# EAGLE board belsekolah (EAGLE 5.11)
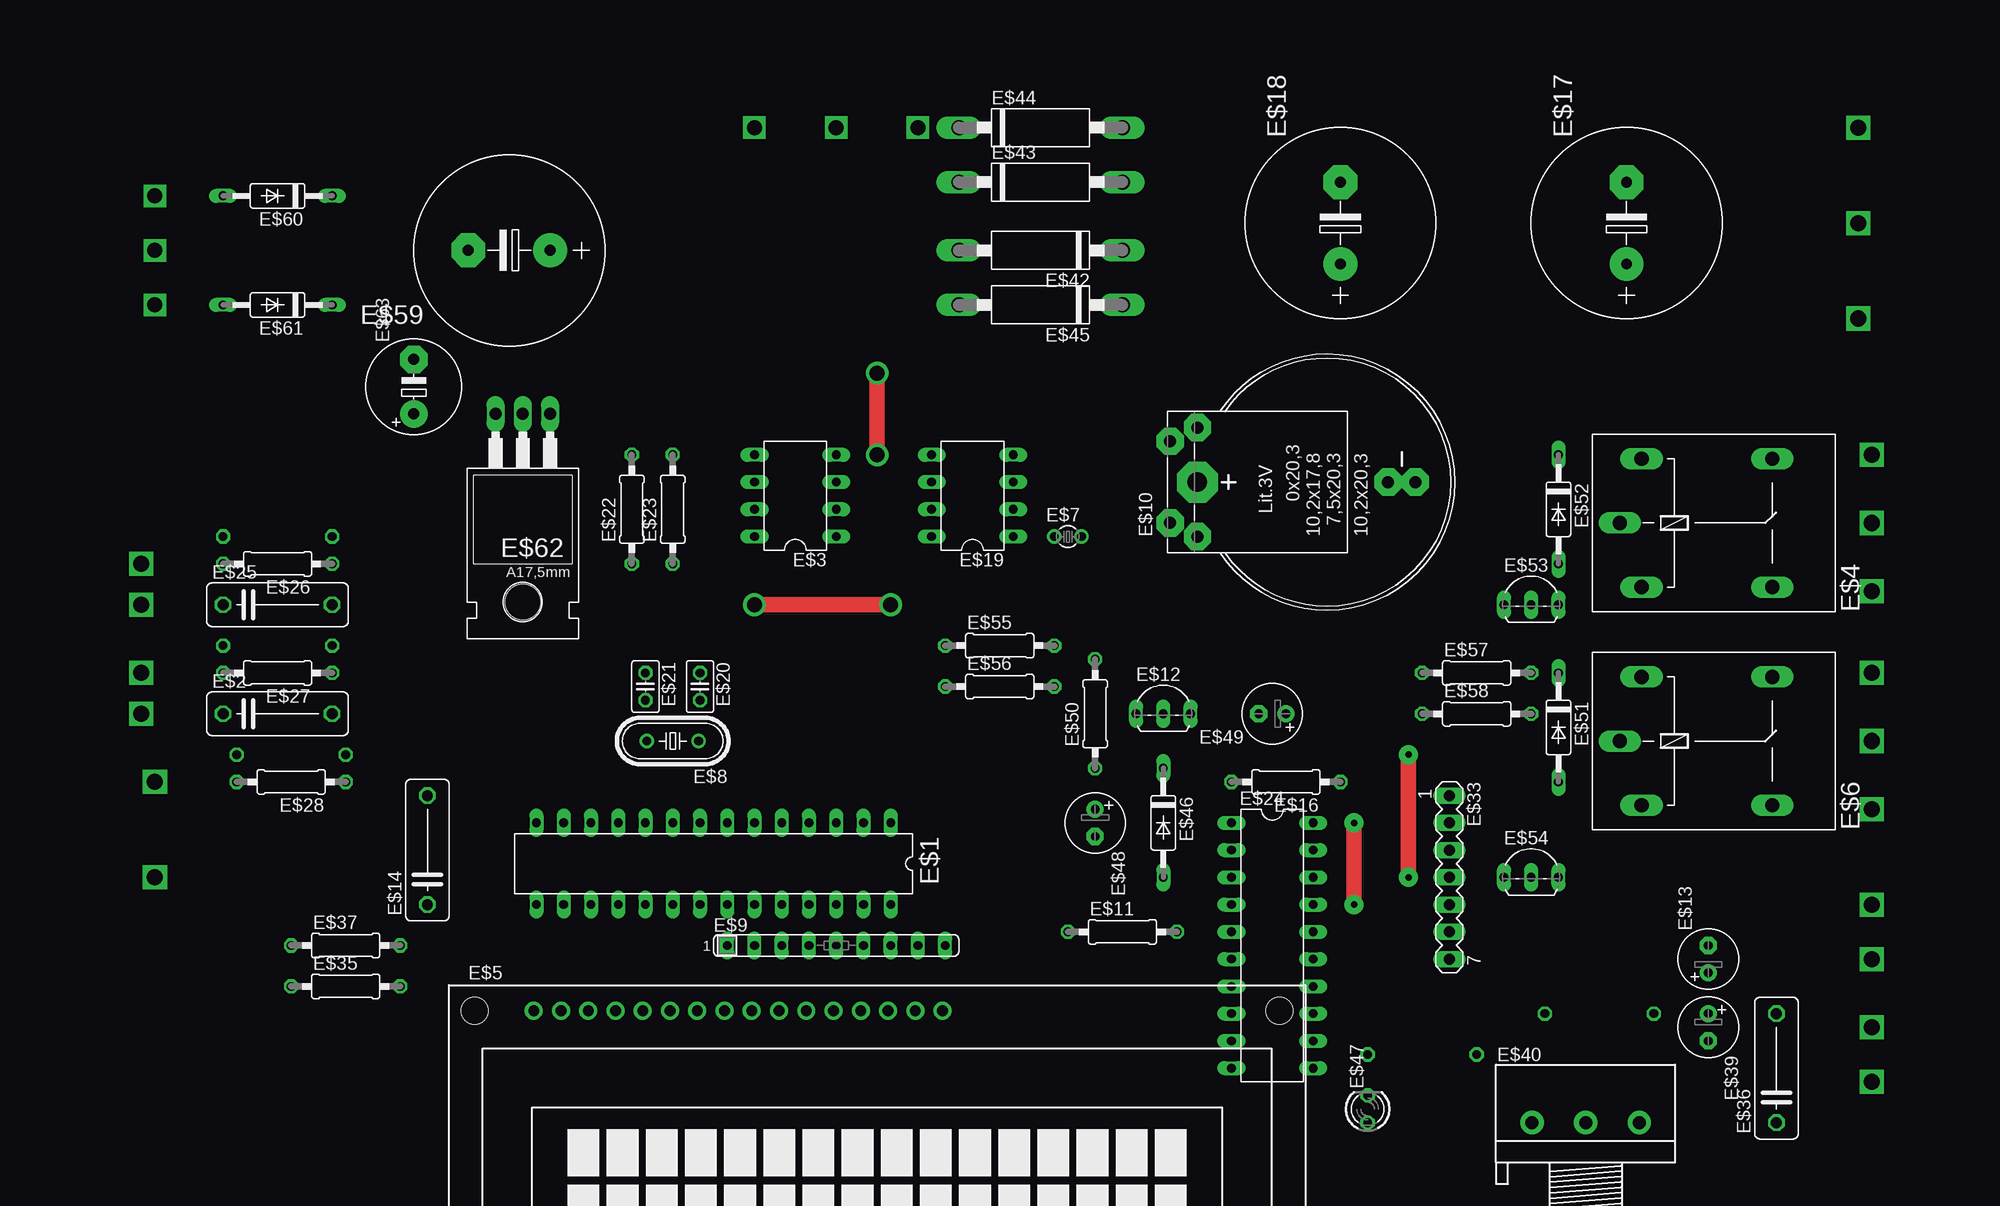
[diagram p0: board, top side]
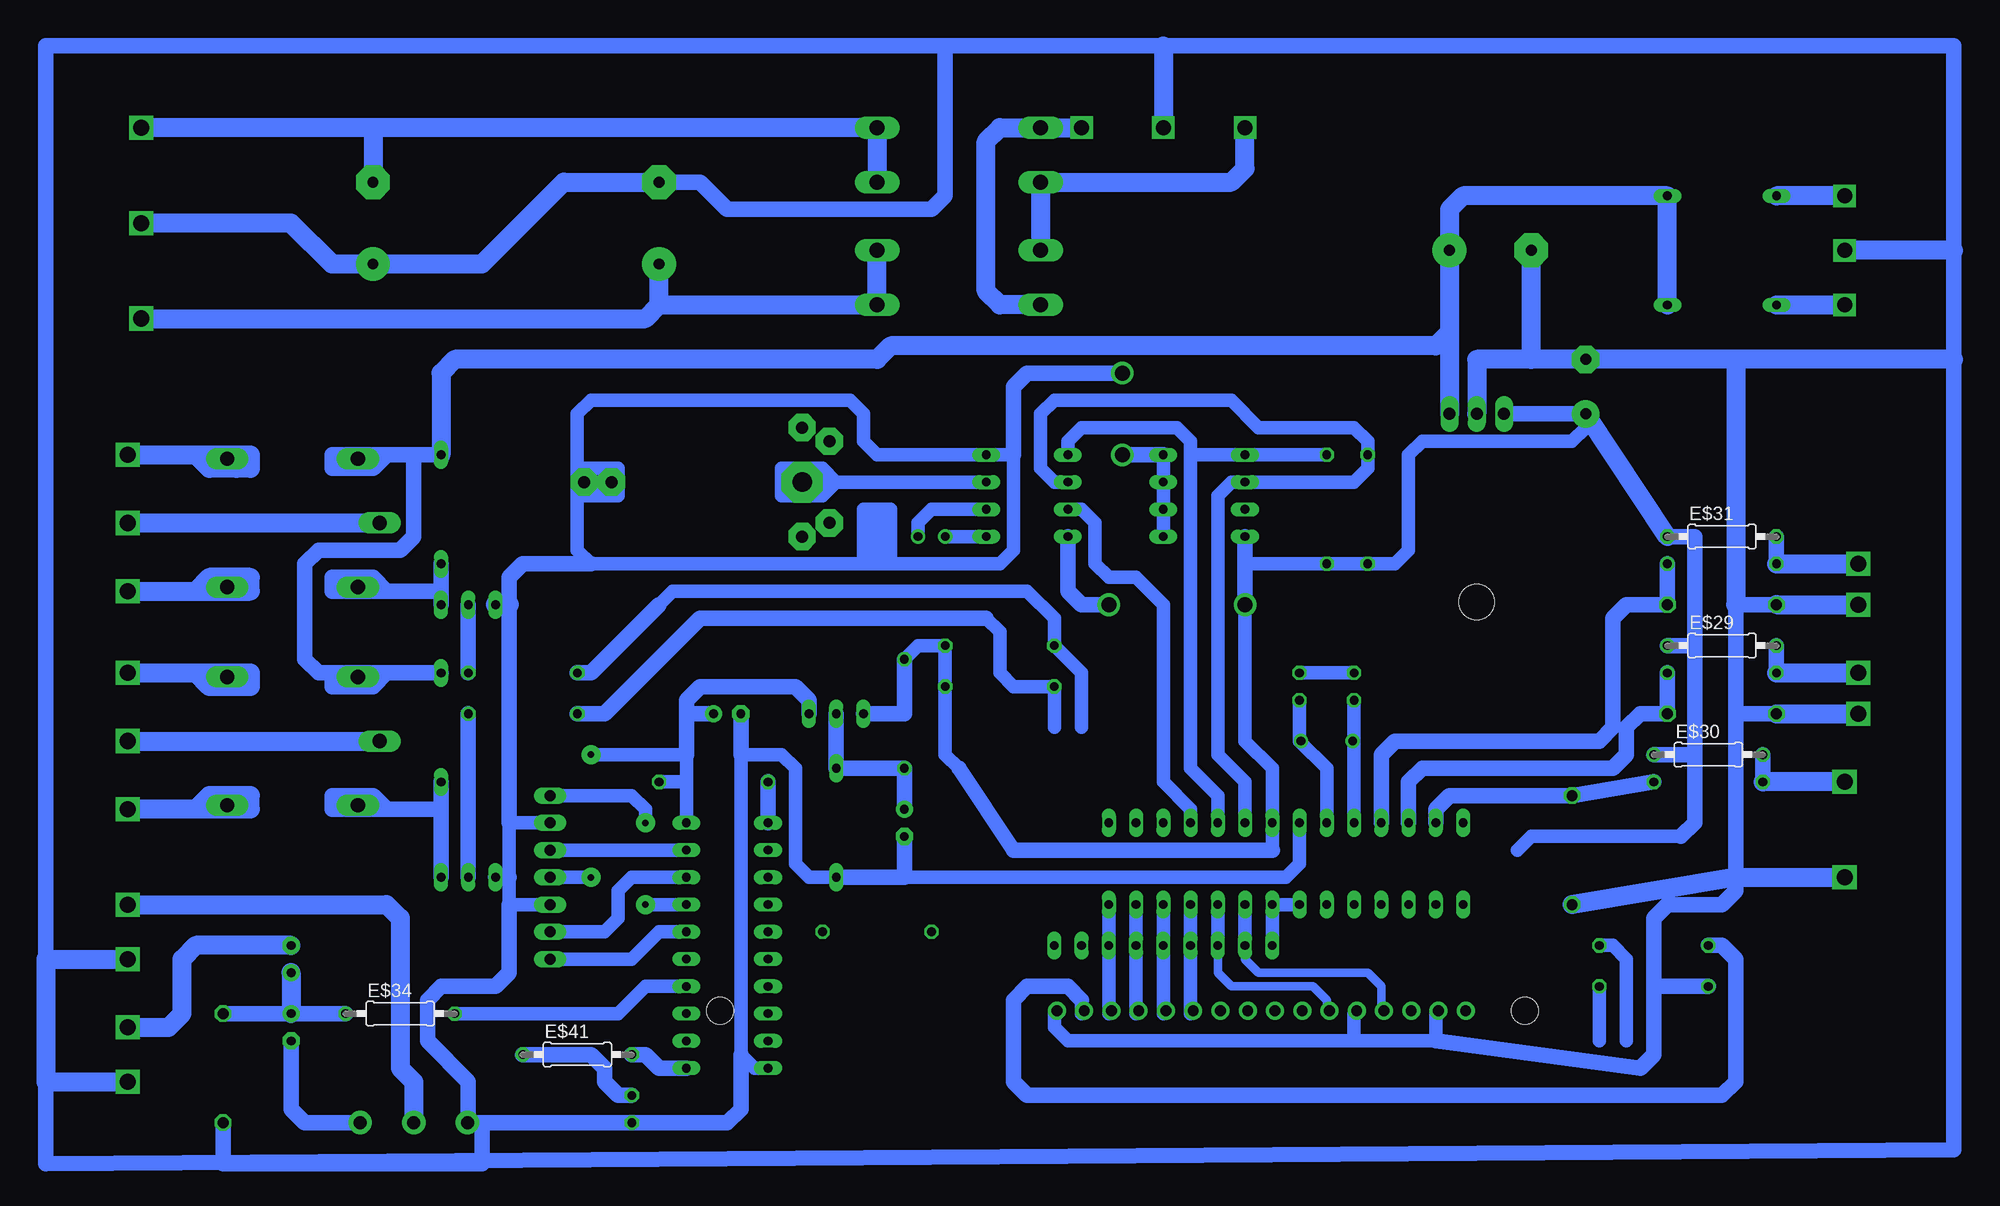
[diagram p1: board, bottom side, seen from below]

No outline drawn. Coordinates in mm, seen from the top.
Copper layers (1*16): Top 0.035mm / dielectric 1.5mm / Bottom 0.035mm
Design rules "default": minimum track width 10mil, minimum drill 24mil, track to track 8mil, track to pad 8mil, pad to pad 8mil, via to via 8mil, smd to smd 8mil, copper to edge 40mil, drill to drill 8mil, minimum pad ring 10mil, minimum via ring 8mil, stop-mask expansion 4mil, vias tented up to drill 0mil, thermal gap 10mil

## Footprints (pad centres in the part's own frame; a part is rotated, then mirrored left to right if it is on the bottom)
DIL28-3 = drill 0.813 long: 1 -16.51,-3.81; 2 -13.97,-3.81; 3 -11.43,-3.81; 4 -8.89,-3.81; 5 -6.35,-3.81; 6 -3.81,-3.81; 7 -1.27,-3.81; 8 1.27,-3.81; 9 3.81,-3.81; 10 6.35,-3.81; 11 8.89,-3.81; 12 11.43,-3.81; 13 13.97,-3.81; 14 16.51,-3.81; 15 16.51,3.81; 16 13.97,3.81; 17 11.43,3.81; 18 8.89,3.81; 19 6.35,3.81; 20 3.81,3.81; 21 1.27,3.81; 22 -1.27,3.81; 23 -3.81,3.81; 24 -6.35,3.81; 25 -8.89,3.81; 26 -11.43,3.81; 27 -13.97,3.81; 28 -16.51,3.81
C102-043X133 = drill 1.016 octagon: 1 -5.08,0; 2 5.08,0
DIL08 = drill 0.813 long: 1 -3.81,-3.81; 2 -1.27,-3.81; 3 1.27,-3.81; 4 3.81,-3.81; 5 3.81,3.81; 6 1.27,3.81; 7 -1.27,3.81; 8 -3.81,3.81
G5LE = drill 1.321 long: 1 -7.493,-5.969; 2 -7.493,5.969; O 4.699,5.969; P -9.525,0; S 4.699,-5.969
TUXGR_16X2_R2 = drill 1 pad 1.676 round: 1 -32,15.5; 2 -29.46,15.5; 3 -26.92,15.5; 4 -24.38,15.5; 5 -21.84,15.5; 6 -19.3,15.5; 7 -16.76,15.5; 8 -14.22,15.5; 9 -11.68,15.5; 10 -9.14,15.5; 11 -6.6,15.5; 12 -4.06,15.5; 13 -1.52,15.5; 14 1.02,15.5; 15 3.56,15.5; 16 6.1,15.5 | hole 2.5: -37.5,-15.5; 37.5,-15.5; -37.5,15.5; 37.5,15.5
TC26V = drill 0.813 round: 1 -1.27,0; 2 1.27,0
HC49/S = drill 0.813 round: 1 -2.413,0; 2 2.413,0
SIL9 = drill 0.813 long: 1 -10.16,0; 2 -7.62,0; 3 -5.08,0; 4 -2.54,0; 5 0,0; 6 2.54,0; 7 5.08,0; 8 7.62,0; 9 10.16,0
B2430UNI = drill 1.118 pad 2.54 octagon: + 3.81,14.605; +@1 -3.81,14.605; +@2 -5.08,12.065; +@3 5.08,12.065; - 0,-5.715; -@1 0,-8.255 | drill 1.803 pad 3.81 octagon: +@4 0,12.065
0207/10 = drill 0.813 octagon: 1 -5.08,0; 2 5.08,0
TO92-CEB = drill 0.813 long: B 2.54,0; C -2.54,0; E 0,0
E2,5-6 = drill 0.813 pad 1.6 round: + -1.27,0 | drill 0.813 pad 1.6 octagon: - 1.27,0
E7,5-18 = drill 1.016 pad 3.15 round: + -3.81,0 | drill 1.016 pad 3.15 octagon: - 3.81,0
C025-025X050 = drill 0.813 octagon: 1 -1.27,0; 2 1.27,0
DIL20 = drill 0.813 long: 1 -11.43,-3.81; 2 -8.89,-3.81; 3 -6.35,-3.81; 4 -3.81,-3.81; 5 -1.27,-3.81; 6 1.27,-3.81; 7 3.81,-3.81; 8 6.35,-3.81; 9 8.89,-3.81; 10 11.43,-3.81; 11 11.43,3.81; 12 8.89,3.81; 13 6.35,3.81; 14 3.81,3.81; 15 1.27,3.81; 16 -1.27,3.81; 17 -3.81,3.81; 18 -6.35,3.81; 19 -8.89,3.81; 20 -11.43,3.81
MA07-1 = drill 1.016 long: 1 -7.62,0; 2 -5.08,0; 3 -2.54,0; 4 0,0; 5 2.54,0; 6 5.08,0; 7 7.62,0
3RP/1610N = drill 1.2 pad 2.184 round: 1 -5,0; 2 0,0; 3 5,0
C1702E15 = drill 1.397 long: A 7.62,0; C -7.62,0
C2992 = drill 0.813 long: A 5.08,0; C -5.08,0
LED3MM = drill 0.813 octagon: A -1.27,0; K 1.27,0
TO220 = drill 1.118 long: 1 -2.54,-6.35; 2 0,-6.35; 3 2.54,-6.35 | hole 3.302: 0,11.176
E5-8,5 = drill 1.016 pad 2.54 round: + -2.54,0 | drill 1.016 pad 2.54 octagon: - 2.54,0

## Placement (x,y rotation side)
E$1  [DIL28-3]  54.61,46.99 180 top
E$2  [C102-043X133]  13.97,60.96 0 top
E$3  [DIL08]  62.23,81.28 90 top
E$4  [G5LE]  148.59,78.74 0 top
E$5  [TUXGR_16X2_R2]  69.85,17.78 0 top
E$6  [G5LE]  148.59,58.42 0 top
E$7  [TC26V]  87.63,77.47 0 top
E$8  [HC49/S]  50.8,58.42 180 top
E$9  [SIL9]  66.04,39.37 0 top
E$10  [B2430UNI]  111.76,82.55 90 top
E$11  [0207/10]  92.71,40.64 0 top
E$12  [TO92-CEB]  96.52,60.96 0 top
E$13  [E2,5-6]  147.32,38.1 90 top
E$14  [C102-043X133]  27.94,48.26 90 top
E$16  [0207/10]  107.95,54.61 180 top
E$17  [E7,5-18]  139.7,106.68 90 top
E$18  [E7,5-18]  113.03,106.68 90 top
E$19  [DIL08]  78.74,81.28 90 top
E$20  [C025-025X050]  53.34,63.5 270 top
E$21  [C025-025X050]  48.26,63.5 270 top
E$22  [0207/10]  46.99,80.01 90 top
E$23  [0207/10]  50.8,80.01 90 top
E$24  [DIL20]  106.68,39.37 270 top
E$25  [C102-043X133]  13.97,71.12 0 top
E$26  [0207/10]  13.97,74.93 180 top
E$27  [0207/10]  13.97,64.77 180 top
E$28  [0207/10]  15.24,54.61 180 top
E$29  [0207/10]  13.97,67.31 0 bottom
E$30  [0207/10]  15.24,57.15 0 bottom
E$31  [0207/10]  13.97,77.47 0 bottom
E$33  [MA07-1]  123.19,45.72 270 top
E$34  [0207/10]  137.16,33.02 0 bottom
E$35  [0207/10]  20.32,35.56 0 top
E$36  [C102-043X133]  153.67,27.94 90 top
E$37  [0207/10]  20.32,39.37 0 top
E$39  [E2,5-6]  147.32,31.75 270 top
E$40  [3RP/1610N]  135.89,22.86 0 top
E$41  [0207/10]  120.65,29.21 0 bottom
E$42  [C1702E15]  85.09,104.14 180 top
E$43  [C1702E15]  85.09,110.49 0 top
E$44  [C1702E15]  85.09,115.57 0 top
E$45  [C1702E15]  85.09,99.06 180 top
E$46  [C2992]  96.52,50.8 270 top
E$47  [LED3MM]  115.57,24.13 90 top
E$48  [E2,5-6]  90.17,50.8 270 top
E$49  [E2,5-6]  106.68,60.96 180 top
E$50  [0207/10]  90.17,60.96 90 top
E$51  [C2992]  133.35,59.69 270 top
E$52  [C2992]  133.35,80.01 270 top
E$53  [TO92-CEB]  130.81,71.12 0 top
E$54  [TO92-CEB]  130.81,45.72 0 top
E$55  [0207/10]  81.28,67.31 0 top
E$56  [0207/10]  81.28,63.5 0 top
E$57  [0207/10]  125.73,64.77 0 top
E$58  [0207/10]  125.73,60.96 0 top
E$59  [E7,5-18]  35.56,104.14 180 top
E$60  [C2992]  13.97,109.22 180 top
E$61  [C2992]  13.97,99.06 180 top
E$62  [TO220]  36.83,82.55 180 top
E$63  [E5-8,5]  26.67,91.44 90 top

## Library data of the parts
E$1 = atmel
E$2 E$11 E$13 E$14 E$16-E$18 E$20-E$23 E$25-E$31 E$34-E$37 E$39 E$41 E$48-E$50 E$55-E$59 E$63 = resistor
E$3 E$19 E$24 = ic-package
E$4 E$6 = relay
E$5 = display-lcd
E$7 E$8 = crystal
E$9 = resistor-sil
E$10 = battery
E$12 E$53 E$54 E$62 = transistor
E$33 = con-lstb
E$40 = pot
E$42-E$46 E$51 E$52 E$60 E$61 = diode
E$47 = led

## Nets
GND: E$2.1 E$14.1 E$17.+ E$18.- E$25.1 E$35.1 E$59.- E$62.2 E$63.-
S$1: E$1.21 E$1.22 E$9.1
S$2: E$37.2
S$3: E$1.23 E$9.2
S$4: E$1.8 E$3.1 E$3.2 E$3.3 E$3.4 E$19.4 E$24.10 E$33.2 E$33.5 E$36.1 E$47.A E$48.- E$49.- E$53.C E$54.C
S$6: E$37.1
S$7: E$19.7
S$8: E$1.10 E$21.2
S$9: E$1.7 E$3.8 E$12.C E$19.8 E$22.1 E$23.1 E$29.1 E$30.1 E$31.1 E$50.2 E$55.2 E$56.2 E$62.3 E$63.+
S$11: E$1.25 E$9.4
S$12: E$1.26 E$9.5
S$13: E$1.27 E$9.6
S$14: E$7.2 E$19.2
S$15: E$35.2
S$16: E$12.E E$46.C E$48.+ E$50.1
S$17: E$7.1 E$19.1
S$18: E$19.3
S$19: E$3.5 E$19.5 E$23.2
S$20: E$17.- E$43.A E$44.A
S$22: E$3.6 E$19.6 E$22.2
S$23: E$55.1 E$57.1
S$24: E$1.9 E$20.2
S$25: E$20.1 E$21.1
S$26: E$24.11 E$41.2
S$27: E$1.28 E$9.7
S$28: E$1.24 E$9.3
S$31: E$14.2 E$28.1
S$32: E$2.2 E$27.1
S$33: E$25.2 E$26.1
S$34: E$41.1 E$47.K
S$35: E$26.2 E$31.2
S$36: E$27.2 E$29.2
S$37: E$24.1
S$38: E$13.+ E$34.1 E$36.2 E$39.+
S$39: E$24.19 E$33.3
S$40: E$24.18 E$33.6
S$41: E$12.B E$24.20 E$33.4 E$49.+
S$42: E$24.16 E$33.7
S$43: E$24.17 E$33.1
S$44: E$44.C E$45.A
S$45: E$54.E E$58.2
S$46: E$24.14 E$34.2
S$47: E$39.-
S$48: E$53.E E$57.2
S$49: E$52.A E$53.B
S$50: E$51.A E$54.B
S$52: E$56.1 E$58.1
S$54: E$28.2 E$30.2
S$55: E$51.C E$52.C E$59.+ E$60.C E$61.C E$62.1
S$56: E$42.A E$43.C
S$57: E$18.+ E$42.C E$45.C
S$62: E$61.A
S$63: E$60.A
S$67: E$40.2
S$69: E$13.-

## Tracks (layer width: path | path; a pad name or v marks a point on that pad's centre or on a via)
GND  (via drill 1.4, 1.5)
  Bottom 1.27: 76.2,33.02 76.2,31.75 74.93,30.48 40.64,30.48 40.64,33.02
  Bottom 1.422: 40.64,30.48 21.59,27.94 20.32,29.21 20.32,35.56 | 20.32,35.56 E$35.1 | 20.32,35.56 20.32,41.91 19.05,43.18 13.97,43.18 12.7,44.45 12.7,45.72 12.7,60.96 | 12.7,60.96 E$2.1 | E$25.1 12.7,71.12 12.7,60.96 | 170.18,26.67 170.18,19.05 -7.62,20.32 -7.62,93.98 -7.62,104.14 -7.62,123.19 66.04,123.19 86.36,123.19 | 170.18,38.1 170.18,123.19 86.36,123.19 | 86.36,123.19 86.36,109.22 87.63,107.95 106.68,107.95 109.22,110.49 E$18.-
  Bottom 1.778: E$14.1 12.7,45.72 v2.54,45.72 | E$2.1 v1.27,60.96 | E$62.2 36.83,93.98 31.75,93.98 | 31.75,93.98 E$59.- | E$25.1 v1.27,71.12 | 31.75,93.98 E$63.- 12.7,93.98 | 12.7,93.98 12.7,71.12 | -7.62,93.98 12.7,93.98 | -7.62,104.14 v2.54,104.14 | v162.56,26.67 170.18,26.67 170.18,38.1 v162.56,38.1 | 66.04,123.19 v66.04,115.57 | E$18.- 121.92,110.49 129.54,102.87 E$17.+ 143.51,102.87 147.32,106.68 v161.29,106.68
S$1
  Bottom 1.27: E$1.21 E$1.22 E$9.1
S$2
  Bottom 1.27: E$37.2 24.13,39.37 22.86,38.1 22.86,30.48
S$3
  Bottom 0.813: E$9.2 58.42,38.1 57.15,36.83 46.99,36.83 45.72,35.56 45.72,33.02
  Bottom 1.27: E$9.2 E$1.23
S$4  (via drill 1.4)
  Top 1.422: v69.85,92.71 v69.85,85.09
  Bottom 1.27: E$3.1 E$3.2 E$3.3 E$3.4 | 120.65,83.82 116.84,83.82 116.84,82.55 | 120.65,83.82 120.65,88.9 119.38,90.17 95.25,90.17 93.98,88.9 93.98,86.36 92.71,85.09 E$19.4 80.01,85.09 80.01,76.2 81.28,74.93 91.44,74.93 | 116.84,82.55 116.84,81.28 120.65,81.28 | 120.65,82.55 120.65,83.82 | 120.65,82.55 116.84,82.55 | 92.71,80.01 91.44,80.01 91.44,74.93 | 92.71,74.93 91.44,74.93 | 92.71,74.93 92.71,80.01 | 92.71,80.01 93.98,80.01 93.98,74.93 | 120.65,81.28 120.65,82.55 | 120.65,81.28 120.65,76.2 119.38,74.93 93.98,74.93 | 93.98,74.93 92.71,74.93 | E$33.2 127,50.8 127,45.72 127,43.18 E$33.5 | E$24.10 104.14,27.94 105.41,29.21 105.41,57.15 101.6,57.15 100.33,55.88 100.33,46.99 99.06,45.72 96.52,45.72 | E$1.8 53.34,46.99 54.61,45.72 90.17,45.72
  Bottom 1.422: v69.85,85.09 E$3.4 | v69.85,92.71 78.74,92.71 80.01,91.44 80.01,85.09 | 119.38,74.93 125.73,74.93 127,73.66 127,71.12 127,50.8 | 127,45.72 E$54.C | 127,43.18 127,36.83 128.27,35.56 133.35,35.56 134.62,34.29 134.62,30.48 130.81,26.67 130.81,22.86 129.54,22.86 | E$36.1 153.67,19.05 129.54,19.05 129.54,22.86 | 129.54,22.86 E$47.A 106.68,22.86 105.41,24.13 105.41,29.21 | 105.41,57.15 E$49.- | E$48.- 90.17,45.72 96.52,45.72
  Bottom 1.778: 127,71.12 E$53.C
S$6
  Bottom 1.27: 73.66,33.02 73.66,34.29
  Bottom 1.422: E$37.1 13.97,39.37 12.7,38.1 12.7,26.67 13.97,25.4 78.74,25.4 80.01,26.67 80.01,34.29 78.74,35.56 74.93,35.56 73.66,34.29
S$7
  Bottom 1.27: 63.5,50.8 63.5,52.07 66.04,54.61 66.04,71.12 68.58,73.66 71.12,73.66 72.39,74.93 72.39,78.74 73.66,80.01 E$19.7
S$8
  Bottom 1.27: E$1.10 E$21.2
S$9  (via drill 1.4)
  Top 1.422: v58.42,71.12 v71.12,71.12
  Bottom 1.27: E$50.2 88.9,67.31 E$55.2 E$56.2 86.36,57.15 85.09,55.88 | 55.88,48.26 E$1.7 55.88,55.88 58.42,58.42 v58.42,71.12 | 58.42,74.93 E$23.1 E$22.1 44.45,74.93 43.18,76.2 43.18,85.09 41.91,86.36 27.94,86.36 26.67,87.63 E$63.+ | 33.02,48.26 31.75,49.53 17.78,49.53
  Bottom 1.422: E$12.C 90.17,60.96 E$50.2 | 85.09,55.88 80.01,48.26 55.88,48.26 | E$19.8 74.93,72.39 73.66,71.12 v71.12,71.12 | E$3.8 58.42,74.93 v58.42,71.12 | E$63.+ E$62.3 | E$31.1 16.51,77.47 16.51,67.31 | 16.51,67.31 E$29.1 | 16.51,57.15 16.51,67.31 | 16.51,57.15 E$30.1 | 16.51,57.15 16.51,50.8 17.78,49.53
  Bottom 1.778: E$31.1 E$63.+
S$11
  Bottom 1.27: E$1.25 E$9.4 63.5,33.02
S$12
  Bottom 1.27: E$1.26 E$9.5 66.04,33.02
S$13
  Bottom 1.27: E$1.27 E$9.6 68.58,33.02
S$14
  Bottom 1.27: E$7.2 88.9,78.74 87.63,80.01 E$19.2
S$15
  Bottom 1.27: E$35.2 25.4,30.48
S$16
  Bottom 1.422: E$12.E E$46.C E$50.1 E$48.+
S$17
  Bottom 1.27: E$7.1 E$19.1
S$18
  Bottom 1.27: E$19.3 96.52,82.55 | 96.52,82.55 101.6,82.55 | 101.6,82.55 101.6,83.82 97.79,83.82 96.52,82.55 | 96.52,82.55 97.79,81.28 101.6,81.28 101.6,82.55
S$19
  Bottom 1.27: 60.96,50.8 60.96,53.34 63.5,55.88 63.5,85.09 | 63.5,85.09 63.5,86.36 64.77,87.63 73.66,87.63 74.93,86.36 E$19.5 | E$23.2 E$3.5 63.5,85.09
S$20  (via drill 1.5)
  Bottom 1.778: E$43.A E$44.A 139.7,115.57 | 139.7,115.57 E$17.- | 139.7,115.57 v161.29,115.57
S$21  (via drill 1.5)
  Bottom 1.778: v162.56,85.09 156.21,85.09 | 156.21,85.09 152.4,85.09 | 152.4,83.82 152.4,85.09 | 152.4,85.09 151.13,85.09 151.13,83.82 154.94,83.82 156.21,85.09
S$22
  Bottom 1.27: 58.42,50.8 58.42,54.61 60.96,57.15 60.96,81.28 59.69,82.55 E$3.6 48.26,82.55 46.99,83.82 E$22.2 46.99,86.36 48.26,87.63 57.15,87.63 59.69,90.17 76.2,90.17 77.47,88.9 77.47,83.82 76.2,82.55 E$19.6
S$23
  Bottom 1.27: 73.66,59.69 73.66,64.77 E$55.1 76.2,69.85 78.74,72.39 80.01,72.39 111.76,72.39 113.03,71.12
  Bottom 1.422: 113.03,71.12 119.38,64.77 E$57.1
S$24
  Bottom 1.27: E$1.9 50.8,55.88 53.34,58.42 E$20.2
S$25
  Bottom 1.27: E$21.1 E$20.1
S$26
  Bottom 1.422: E$41.2 114.3,29.21 113.03,27.94 E$24.11
S$27
  Bottom 1.27: E$1.28 E$9.7 71.12,33.02
S$28
  Bottom 0.813: 50.8,33.02 50.8,34.29 52.07,35.56 59.69,35.56 60.96,36.83 E$9.3
  Bottom 1.27: E$1.24 E$9.3
S$29
  Bottom 1.27: 48.26,33.02 48.26,30.48
S$31
  Bottom 1.422: E$28.1 E$14.2 39.37,53.34 40.64,52.07 40.64,50.8
S$32
  Bottom 1.422: E$27.1 E$2.2 21.59,60.96 22.86,59.69 22.86,57.15 24.13,55.88 41.91,55.88 43.18,54.61 43.18,50.8
S$33
  Bottom 1.422: E$26.1 E$25.2 22.86,71.12 24.13,69.85 24.13,59.69 25.4,58.42 44.45,58.42 45.72,57.15 45.72,50.8
S$34
  Bottom 1.422: E$47.K 116.84,25.4 118.11,26.67 118.11,27.94 119.38,29.21 E$41.1
S$35  (via drill 1.5)
  Bottom 1.422: E$31.2 E$26.2
  Bottom 1.778: E$26.2 v1.27,74.93
S$36  (via drill 1.5)
  Bottom 1.422: E$29.2 E$27.2
  Bottom 1.778: E$27.2 v1.27,64.77
S$37
  Bottom 1.422: E$24.1 102.87,54.61
S$38
  Bottom 1.422: E$34.1 E$39.+ E$36.2
  Bottom 1.778: E$13.+ E$39.+
S$39
  Bottom 1.27: E$24.19 E$33.3
S$40
  Bottom 1.27: E$24.18 115.57,45.72 116.84,44.45 116.84,41.91 118.11,40.64 E$33.6
S$41  (via drill 0.6 pad 1.78)
  Top 1.422: v119.38,57.15 v119.38,45.72
  Bottom 1.27: v119.38,45.72 E$33.4 | v119.38,57.15 110.49,57.15 110.49,54.61 | 110.49,54.61 113.03,54.61 | E$24.20 110.49,54.61
  Bottom 1.422: E$12.B 99.06,62.23 100.33,63.5 109.22,63.5 110.49,62.23 110.49,60.96 | 110.49,57.15 110.49,60.96 | 110.49,60.96 E$49.+
S$42
  Bottom 1.27: E$24.16 113.03,40.64 115.57,38.1 E$33.7
S$43  (via drill 0.6 pad 1.78)
  Top 1.422: v114.3,43.18 v114.3,50.8
  Bottom 1.27: E$24.17 v114.3,43.18 | E$33.1 115.57,53.34 114.3,52.07 v114.3,50.8
S$44  (via drill 1.4)
  Bottom 1.778: E$45.A 81.28,99.06 82.55,100.33 82.55,114.3 81.28,115.57 E$44.C v73.66,115.57
S$45
  Bottom 1.422: E$54.E E$58.2
S$46
  Bottom 1.27: E$24.14 114.3,35.56 116.84,33.02 E$34.2
S$47
  Bottom 1.422: E$39.- 147.32,24.13 146.05,22.86 140.97,22.86
S$48
  Bottom 1.422: E$57.2 E$53.E
S$49
  Bottom 1.422: E$53.B 133.35,72.39 | 133.35,72.39 E$52.A | 138.43,72.39 143.51,72.39 143.51,73.66 139.7,73.66 138.43,72.39 | 138.43,72.39 133.35,72.39
S$50
  Bottom 1.422: E$54.B 133.35,52.07 | 133.35,52.07 E$51.A | 138.43,52.07 143.51,52.07 143.51,53.34 139.7,53.34 138.43,52.07 | 138.43,52.07 133.35,52.07
S$52
  Bottom 1.27: 76.2,59.69 E$56.1 80.01,63.5 81.28,64.77 81.28,68.58 82.55,69.85
  Bottom 1.422: E$58.1 118.11,60.96 109.22,69.85 82.55,69.85
S$53  (via drill 1.5)
  Bottom 1.778: v162.56,78.74 138.43,78.74
S$54  (via drill 1.5)
  Bottom 1.422: E$28.2 E$30.2
  Bottom 1.778: v2.54,54.61 E$28.2
S$55
  Bottom 1.422: 138.43,64.77 E$51.C | 138.43,64.77 139.7,63.5 143.51,63.5 143.51,64.77 | 143.51,64.77 138.43,64.77 | 143.51,64.77 144.78,64.77 146.05,66.04 146.05,74.93 144.78,76.2 137.16,76.2 135.89,77.47 135.89,85.09 | 138.43,85.09 143.51,85.09 143.51,83.82 139.7,83.82 138.43,85.09 | 135.89,85.09 138.43,85.09 | E$52.C 135.89,85.09
  Bottom 1.778: E$52.C 133.35,92.71 132.08,93.98 92.71,93.98 91.44,95.25 40.64,95.25 39.37,96.52 | 39.37,96.52 E$62.1 | 39.37,96.52 E$59.+ 39.37,107.95 38.1,109.22 E$60.C E$61.C
S$56  (via drill 1.4)
  Bottom 1.778: E$42.A E$43.C 59.69,110.49 58.42,111.76 v58.42,115.57
S$57  (via drill 1.5)
  Bottom 1.778: v161.29,97.79 114.3,97.79 113.03,99.06 | E$42.C E$45.C 113.03,99.06 | 113.03,99.06 E$18.+
S$60  (via drill 1.5)
  Bottom 1.778: v162.56,72.39 156.21,72.39 | 156.21,72.39 151.13,72.39 151.13,73.66 154.94,73.66 156.21,72.39
S$61  (via drill 1.5)
  Bottom 1.778: v162.56,64.77 156.21,64.77 | 156.21,64.77 151.13,64.77 151.13,63.5 154.94,63.5 156.21,64.77
S$62  (via drill 1.4)
  Bottom 1.778: E$61.A v2.54,99.06
S$63  (via drill 1.4)
  Bottom 1.778: v2.54,109.22 E$60.A
S$64  (via drill 1.5)
  Bottom 1.778: v162.56,58.42 138.43,58.42
S$65  (via drill 1.5)
  Bottom 1.778: 156.21,52.07 151.13,52.07 151.13,53.34 154.94,53.34 156.21,52.07 | 156.21,52.07 v162.56,52.07
S$67  (via drill 1.5)
  Bottom 1.778: v162.56,43.18 138.43,43.18 137.16,41.91 137.16,27.94 135.89,26.67 E$40.2
S$69  (via drill 1.5)
  Bottom 1.778: v162.56,31.75 158.75,31.75 157.48,33.02 157.48,38.1 156.21,39.37 E$13.-